# Altium PCB DEBUG_ABZ.PcbDoc
Units mm, origin at the board's own origin, x right, y up, seen from the top; angles counter-clockwise.
Board outline 45.97 x 52.51 mm, 2 copper layers (Top Layer, Bottom Layer), stack 1.57 mm thick; 30 components, 38 nets, 172 pads, 192 vias.
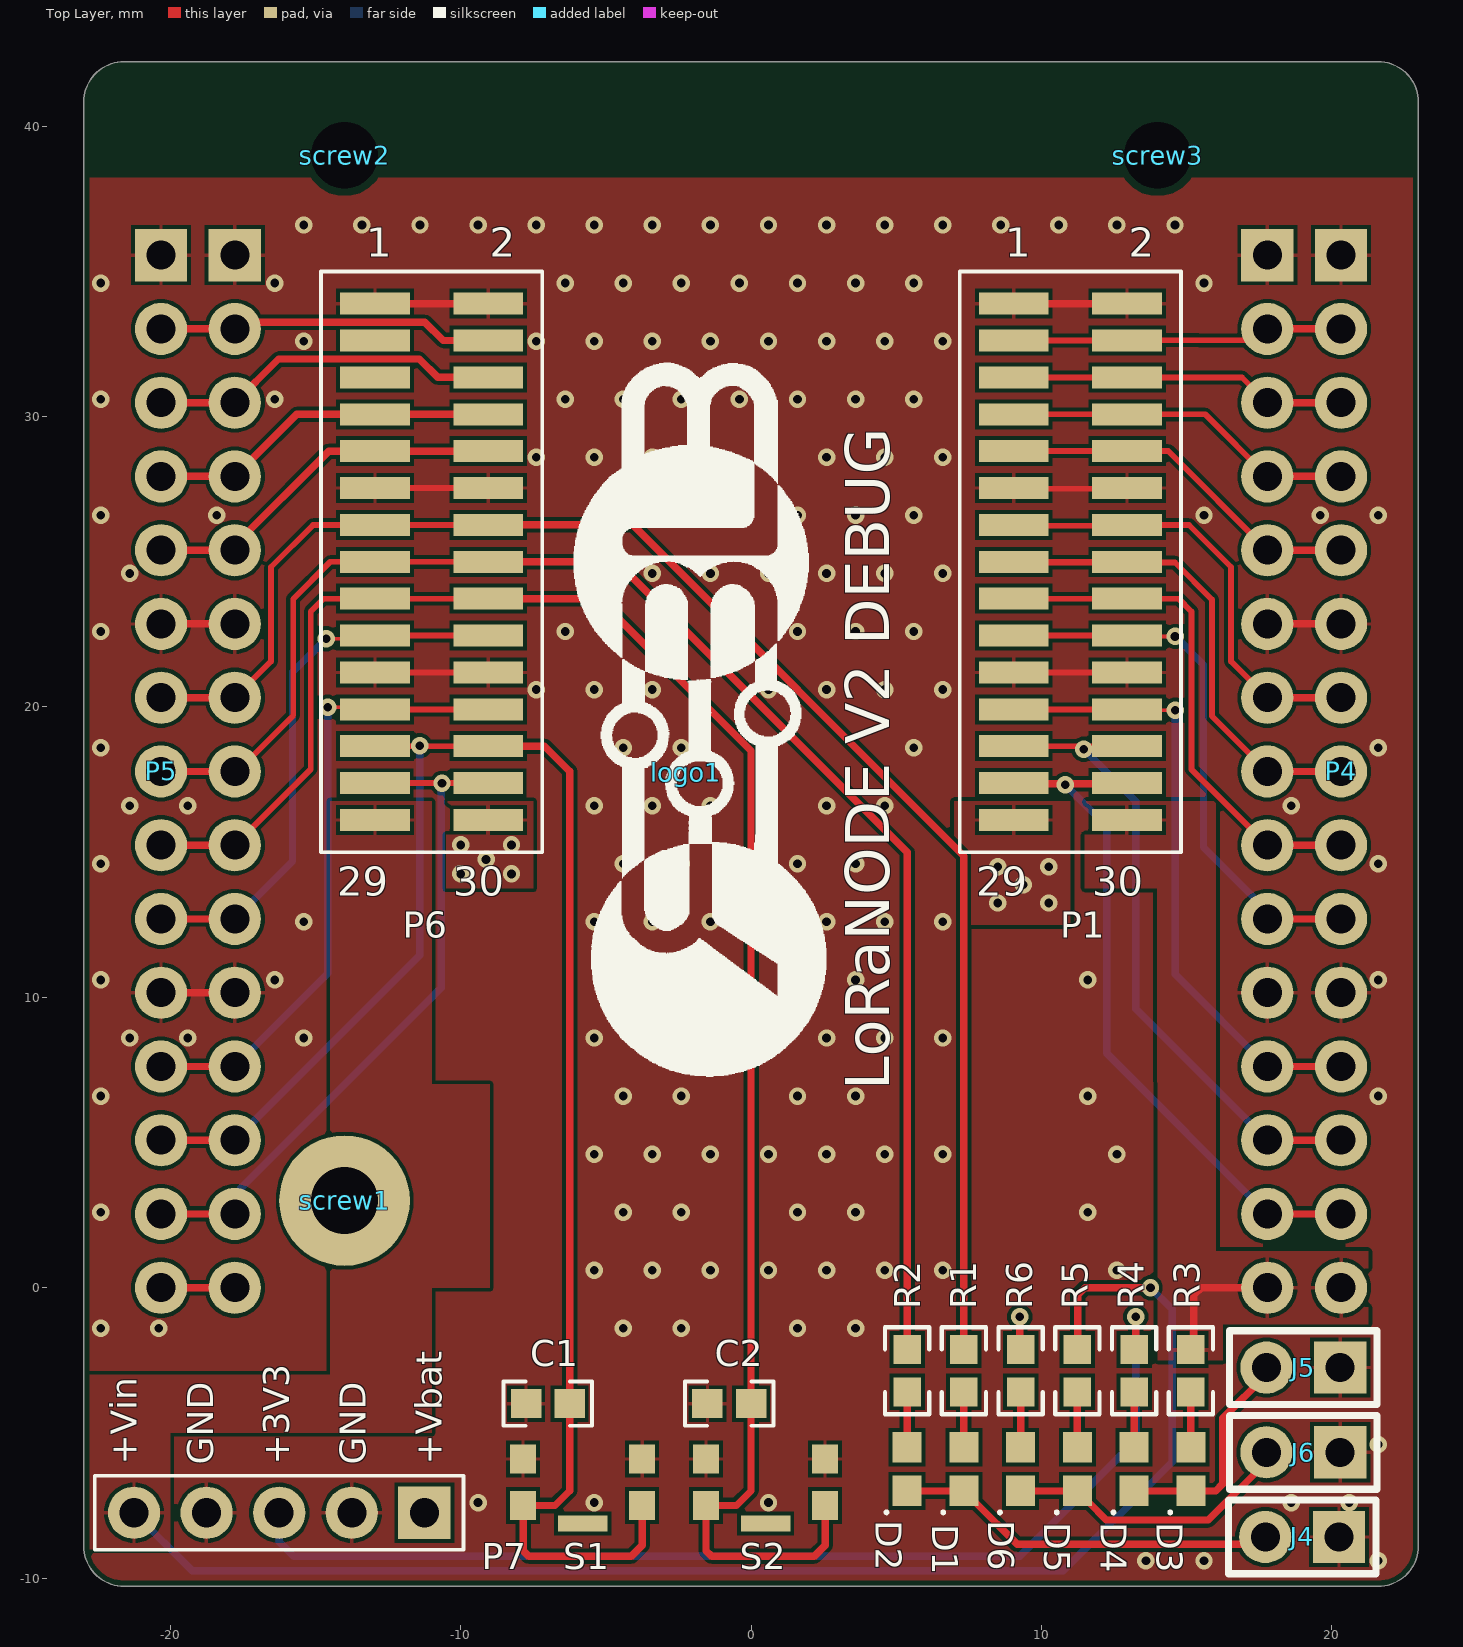
[diagram p0: Top Layer view]
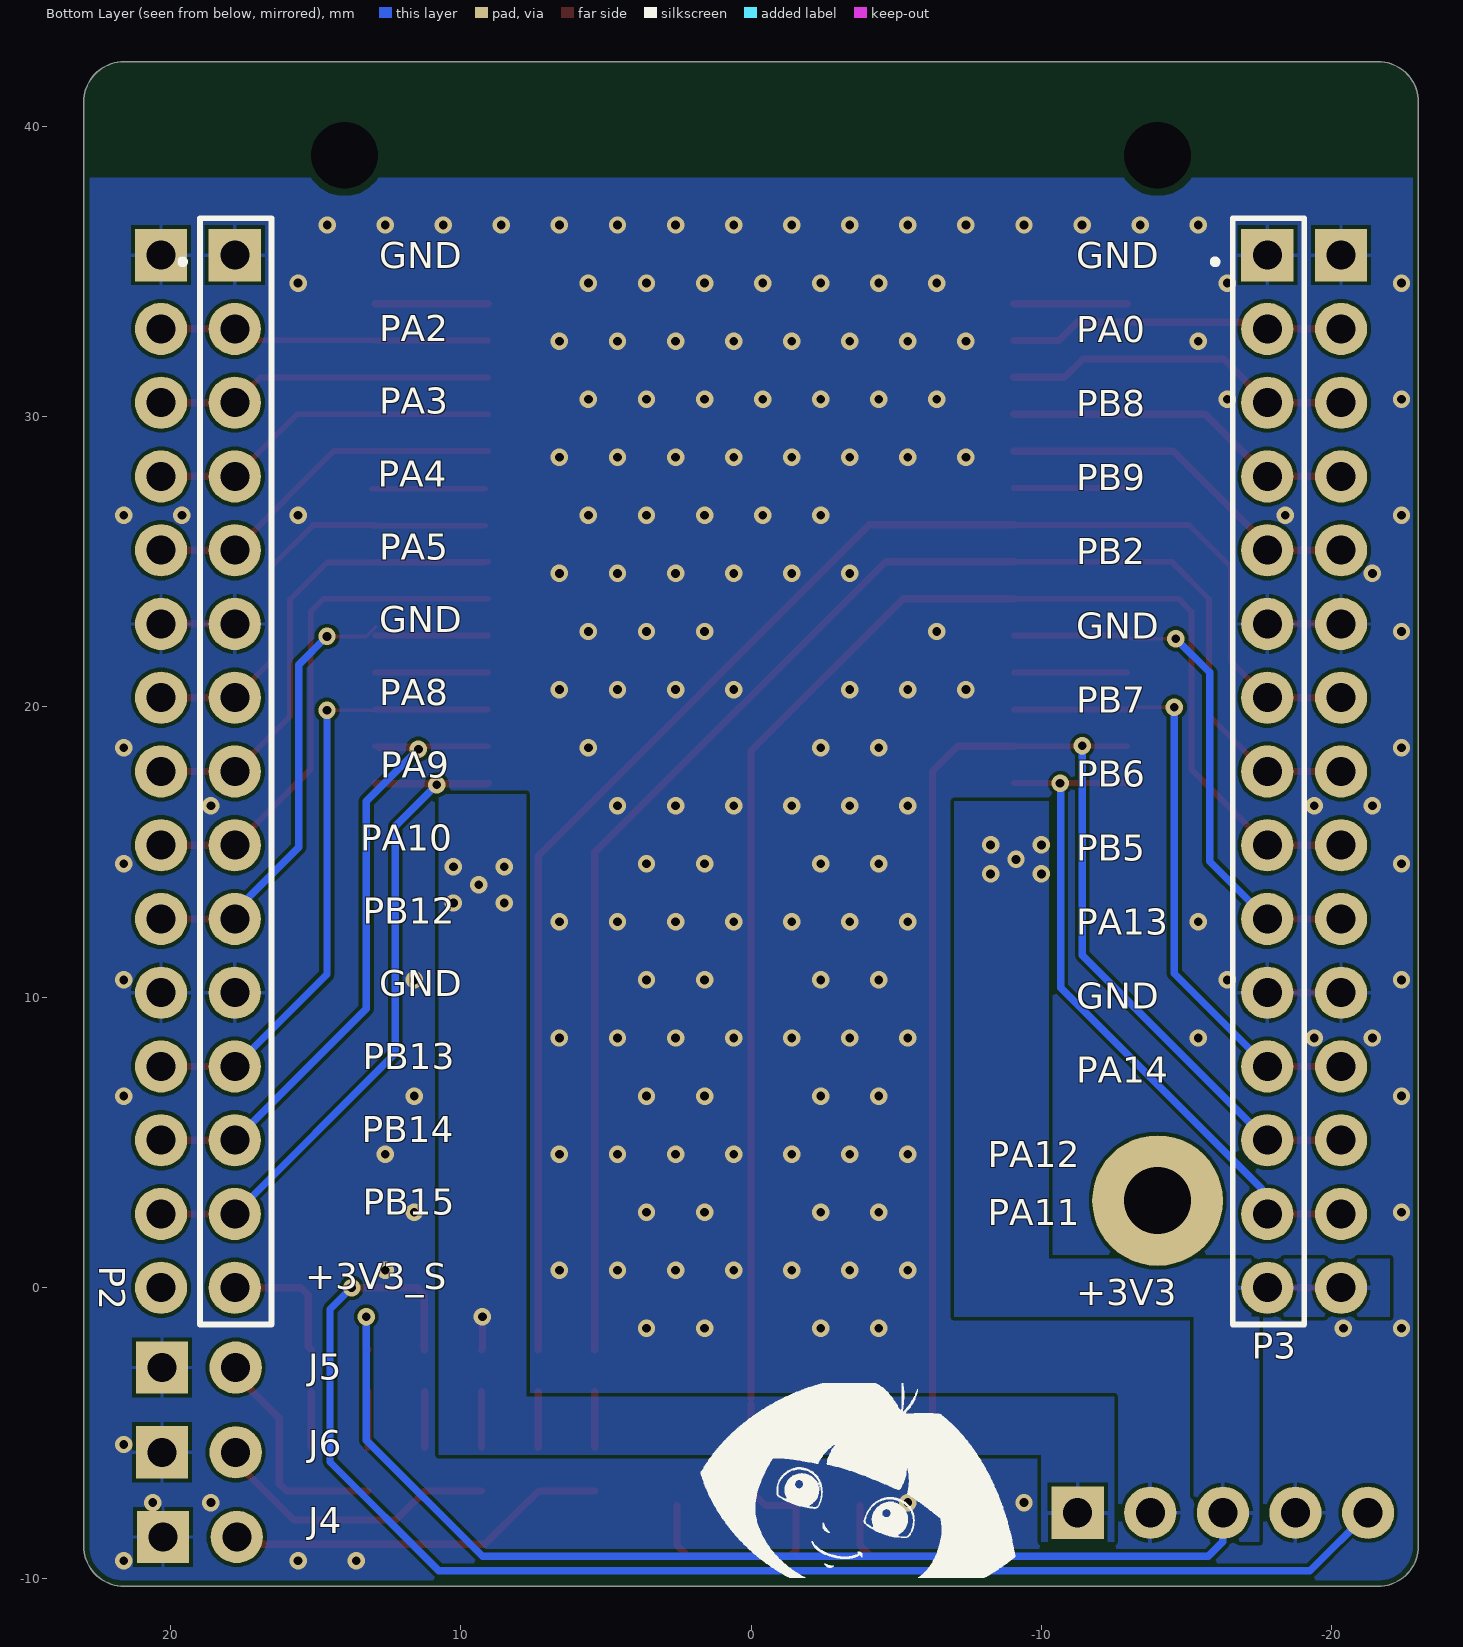
[diagram p1: Bottom Layer view, seen from below]
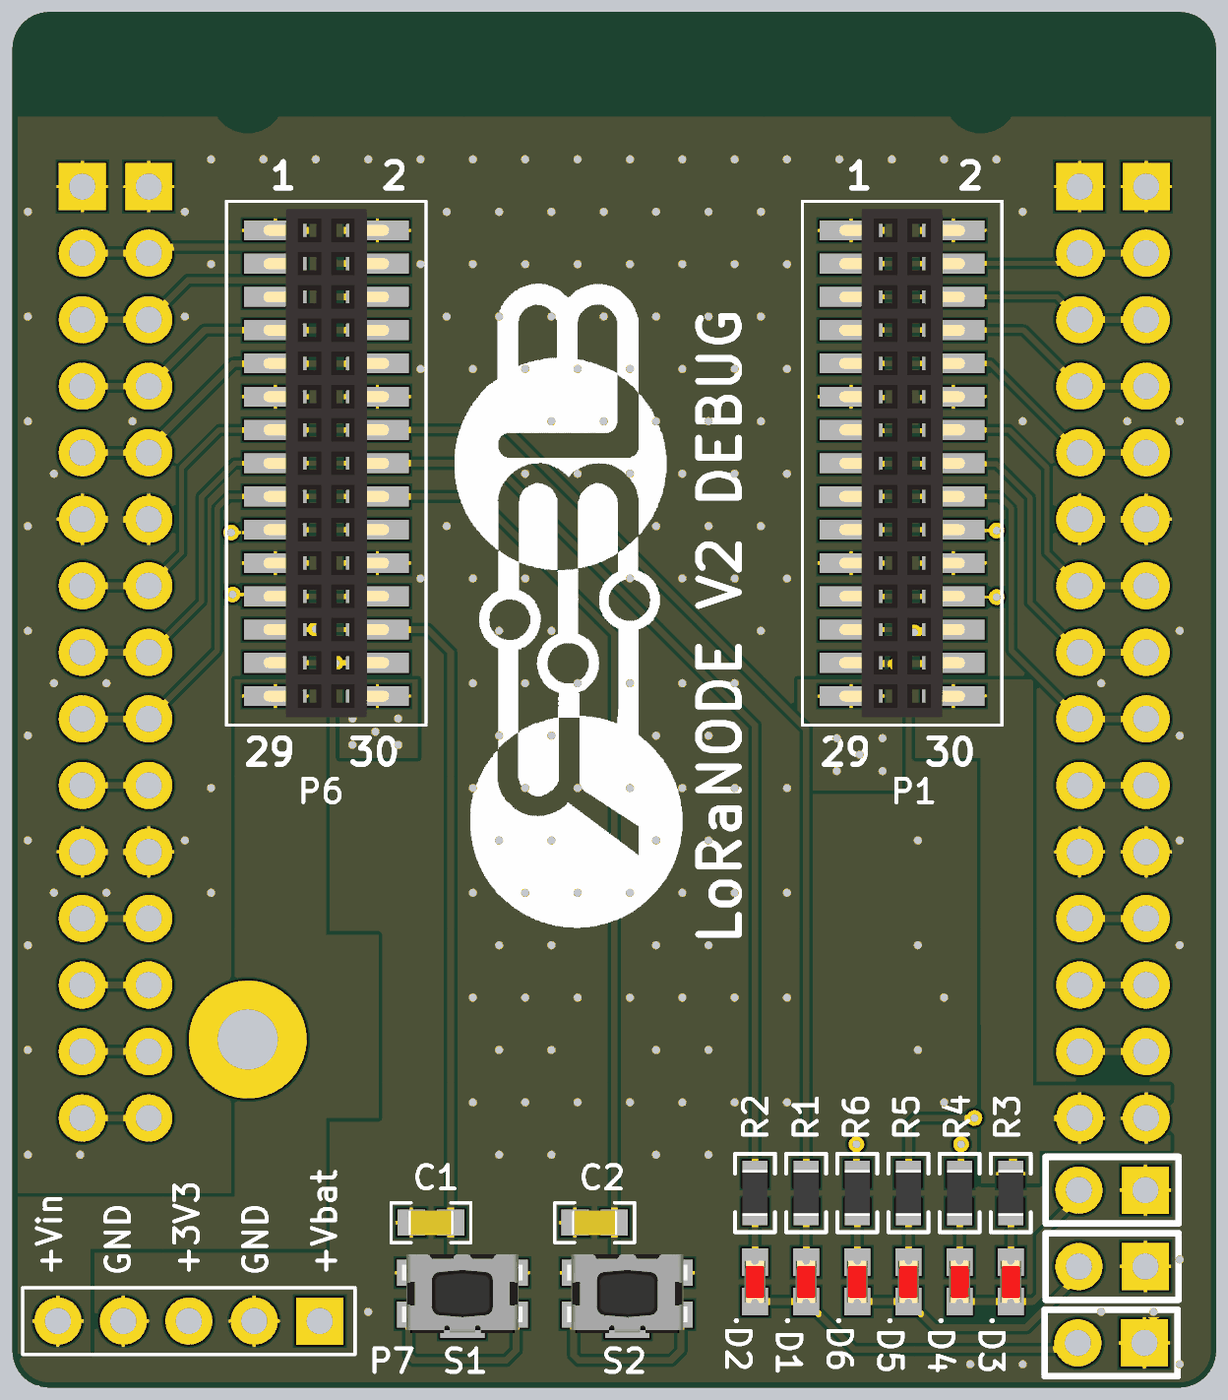
[diagram p2: 3D render of the assembled board from above, using the file's embedded part models]

## Layer stack, top to bottom
Top Solder: solder mask 0.0127, Solder Resist, Dk 3.8
Top Layer: signal copper 0.035
Dielectric: core 1.5, FR-4, Dk 4.5
Bottom Layer: signal copper 0.035
Bottom Solder: solder mask 0.0127, Solder Resist, Dk 3.8

## Board outline
-22.985,-8.89 ccw(c-21.59,-8.89) -21.59,-10.285 21.59,-10.285 ccw(c21.59,-8.89) 22.985,-8.89 22.985,40.83 ccw(c21.59,40.83) 21.59,42.225 -21.589,42.225 ccw(c-21.59,42.1) -21.59,42.225 ccw(c-21.59,40.83) -22.985,40.83

## Design rules (kind name [scope] priority, off if disabled: settings)
BoardOutlineClearance [All] p1: gap=0.2 ignorepadtopadclearanceinfootprint=FALSE
Clearance [All] p1: gap=0.127 ignorepadtopadclearanceinfootprint=FALSE except(0.25: Arc-Hole Track-Hole SMDPad-Hole THPad-Hole Via-Hole Fill-Hole Poly-Hole Region-Hole Text-Hole)
ComponentClearance [All] p1: gap=0.127 collisioncheckmode=3 verticalgap=0.127 showdistances=TRUE
DiffPairsRouting [All] p1: maxlimit=0.254 minlimit=0.127 mostfreqgap=0.127 toplayer_minwidth=0.127 toplayer_maxwidth=25.4 toplayer_prefwidth=0.127 bottomlayer_minwidth=0.127 bottomlayer_maxwidth=25.4 bottomlayer_prefwidth=0.127 maxuncoupledlength=12.7
Height [All] p1: minheight=0 maxheight=1816.048 prefheight=12.7
HoleSize [All] p1: absolutevalues=TRUE maxlimit=6.3 minlimit=0.3 maxpercent=80.000 minpercent=20.000
HoleToHoleClearance [All] p1: gap=0.25 allowstackedmicrovias=FALSE
MinimumAnnularRing [All] p1: minimumring=0.076
MinimumSolderMaskSliver [All] p1: minsoldermaskwidth=0
PlaneClearance [All] p1: clearance=0.127
PlaneConnect PlaneConnectPowerPads [InPadClass('PowerPads')] p1: planeconnectstyle=Direct reliefexpansion=0.508 reliefentries=4 reliefconductorwidth=0.254 reliefairgap=0.254
PlaneConnect [All] p2: pad.planeconnectstyle=Relief pad.reliefexpansion=0.3 pad.reliefentries=4 pad.reliefconductorwidth=0.127 pad.reliefairgap=0.127 via.planeconnectstyle=Direct via.reliefexpansion=0.3 via.reliefentries=4 via.reliefconductorwidth=0.127 via.reliefairgap=0.127
PolygonConnect PolygonConnectPowerPads [All vs (InPadClass('PowerPads'))] p1: connectstyle=Direct reliefconductorwidth=0.254 reliefentries=4 polygonreliefangle="90 Angle" airgapwidth=0.254
PolygonConnect [All] p2: thpad.connectstyle=Relief thpad.reliefconductorwidth=0.127 thpad.reliefentries=4 thpad.polygonreliefangle="90 Angle" thpad.airgapwidth=0.127 smdpad.connectstyle=Relief smdpad.reliefconductorwidth=0.127 smdpad.reliefentries=4 smdpad.polygonreliefangle="90 Angle" smdpad.airgapwidth=0.127 via.connectstyle=Direct via.reliefconductorwidth=0.127 via.reliefentries=4 via.polygonreliefangle="90 Angle" via.airgapwidth=0.127
RoutingVias [All] p1: holewidth=0.3 width=0.6 viastyle="Through Hole" minholewidth=0.3 minwidth=0.6 maxholewidth=0.6 maxwidth=6.6
SilkToSilkClearance [All] p1: silktosilkclearance=0
SilkToSolderMaskClearance [IsPad] p1: minsilkscreentomaskgap=0.127 clearancetoexposedcopper=TRUE
SolderMaskExpansion [All] p1: expansion=0.075 istentingtop=FALSE
Width [All] p1: maxlimit=25.4 minlimit=0.127 preferedwidth=0.127 minimp=50.000000 maximp=50.000000 favimp=50.000000
20 further rules are at their usual default settings.

## Components (designator, comment, footprint, x,y, rotation, side; value= is the part's Value field where it differs from the comment)
C1 "0.1uF 0603" CAP_SMD_0603 -7,-3.995 r180 top
C2 "0.1uF 0603" CAP_SMD_0603 -0.75,-3.995 r180 top
D1 "0603 RED" DIODE_LED_SMD_0603 7.331,-6.25 r270 top
D2 "0603 RED" DIODE_LED_SMD_0603 5.377,-6.25 r270 top
D3 "0603 RED" DIODE_LED_SMD_0603 15.147,-6.25 r270 top
D4 "0603 RED" DIODE_LED_SMD_0603 13.193,-6.25 r270 top
D5 "0603 RED" DIODE_LED_SMD_0603 11.239,-6.25 r270 top
D6 "0603 RED" DIODE_LED_SMD_0603 9.285,-6.25 r270 top
J4 "-" JUMPER_1X2_2.54 20.25,-8.585 r180 top
J5 "-" JUMPER_1X2_2.54 20.29,-2.75 r180 top
J6 "-" JUMPER_1X2_2.54 20.29,-5.667 r180 top
logo1 "LoRaNODE V2 DEBUG" Robolabo10x25 -2.25,17.75 r90 top
P1 "-" CONN-2X15-1.27-FEMALE_RECT-SMD 11,25 r270 top locked
P2 "-" CONN-1X15-2.54-MALE-TH 17.78,35.56 r270 bottom
P3 "-" CONN-1X15-2.54-MALE-TH -17.78,35.56 r270 bottom
P4 "-" CONN-1X15-2.54-MALE-TH-NOPIN 20.32,35.56 r270 top
P5 "-" CONN-1X15-2.54-MALE-TH-NOPIN -20.32,35.56 r270 top
P6 "-" CONN-2X15-1.27-FEMALE_RECT-SMD -11,25 r270 top locked
P7 "-" CONN-1X5-2.54-MALE-TH -16.25,-7.75 r180 top
R1 "470R 0603 1%" RES_SMD_0603 7.331,-2.858 r90 top
R2 "470R 0603 1%" RES_SMD_0603 5.377,-2.858 r90 top
R3 "470R 0603 1%" RES_SMD_0603 15.147,-2.858 r90 top
R4 "470R 0603 1%" RES_SMD_0603 13.193,-2.858 r90 top
R5 "470R 0603 1%" RES_SMD_0603 11.239,-2.858 r90 top
R6 "470R 0603 1%" RES_SMD_0603 9.285,-2.858 r90 top
S1 "SPST 4.6x2.8mm" KMR4_CK_SWITCH -5.8,-6.7 r180 top
S2 "SPST 4.6x2.8mm" KMR4_CK_SWITCH 0.5,-6.7 r180 top
screw1 "M2" M2 26.6,-7.65 r90 top
screw2 "M2" M2_NOPAD#1 36.6,-7.65 r90 top
screw3 "M2" M2_NOPAD#2 47.1,-7.65 r90 top

## Footprints (in the part's own frame and the unit in brackets; to place one, negate y for a bottom-side part, rotate by r counter-clockwise, add the part's x,y. Pads: shape width x height; smd on the part's side, far side on the other; paste and mask are expansions set on the pad)
CAP_SMD_0603 [mm]
  rect 1.05x1 smd: 1(-0.75,0) 2(0.75,0)
  silkscreen extent -1.52,-0.76 1.52,0.76, body extent -0.87,-0.48 0.87,0.48, height 0.55
CONN-1X5-2.54-MALE-TH [mm]
  rect 1.8x1.8 hole 1: 1(-5,0)
  round 1.8 hole 1: 2(-2.5,0) 3(0,0) 4(2.5,0) 5(5,0)
  silkscreen extent -6.35,-1.27 6.35,1.27
CONN-1X15-2.54-MALE-TH [mm]
  rect 1.8x1.8 hole 1: 1(0,0)
  round 1.8 hole 1: 2(2.54,0) 3(5.08,0) 4(7.62,0) 5(10.16,0) 6(12.7,0) 7(15.24,0) 8(17.78,0) 9(20.32,0) 10(22.86,0) 11(25.4,0) 12(27.94,0) 13(30.48,0) 14(33.02,0) 15(35.56,0)
  silkscreen extent -1.27,-1.85 36.83,1.27, body extent -1.27,-1.27 36.83,1.27, height 12.7
CONN-1X15-2.54-MALE-TH-NOPIN [mm]
  rect 1.8x1.8 hole 1: 1(0,0)
  round 1.8 hole 1: 2(2.54,0) 3(5.08,0) 4(7.62,0) 5(10.16,0) 6(12.7,0) 7(15.24,0) 8(17.78,0) 9(20.32,0) 10(22.86,0) 11(25.4,0) 12(27.94,0) 13(30.48,0) 14(33.02,0) 15(35.56,0)
CONN-2X15-1.27-FEMALE_RECT-SMD [mm]
  rect 0.76x2.4 smd: 1(-8.89,-1.95) 2(-8.89,1.95) 3(-7.62,-1.95) 4(-7.62,1.95) 5(-6.35,-1.95) 6(-6.35,1.95) 7(-5.08,-1.95) 8(-5.08,1.95) 9(-3.81,-1.95) 10(-3.81,1.95) 11(-2.54,-1.95) 12(-2.54,1.95) 13(-1.27,-1.95) 14(-1.27,1.95) 15(0,-1.95) 16(0,1.95) 17(1.27,-1.95) 18(1.27,1.95) 19(2.54,-1.95) 20(2.54,1.95) 21(3.81,-1.95) 22(3.81,1.95) 23(5.08,-1.95) 24(5.08,1.95) 25(6.35,-1.95) 26(6.35,1.95) 27(7.62,-1.95) 28(7.62,1.95) 29(8.89,-1.95) 30(8.89,1.95)
  silkscreen extent -10,-3.81 10,3.81, body extent -9.7,-2.4 9.7,2.4, height 4.6
DIODE_LED_SMD_0603 [mm]
  rect 1.05x1 smd: 1(-0.75,0) 2(0.75,0)
  silkscreen extent 1.44,-0.76 1.54,-0.66, body extent -0.81,-0.4 0.81,0.4, height 0.6
JUMPER_1X2_2.54 [mm]
  rect 1.8x1.8 hole 1: 1(0,0)
  round 1.8 hole 1: 2(2.54,0)
  silkscreen extent -1.27,-1.27 3.81,1.27, body extent -1.27,-1.27 3.81,1.27, height 12.7
KMR4_CK_SWITCH [mm]
  rect 0.9x1 smd: 1(-2.05,0.8) 1(2.05,0.8) 2(-2.05,-0.8) 2(2.05,-0.8)
  rect 1.7x0.55 smd: GND(0,1.425)
  body extent -2.3,-1.5 2.3,1.5, height 2.1
M2 [mm] "screw M2.5"
  round 4.5 hole 2.3: H1(10.65,40.6)
M2_NOPAD#1 [mm] "screw M2.5"
  round 0 hole 2.3: H1(46.65,50.6)
M2_NOPAD#2 [mm] "screw M2.5"
  round 0 hole 2.3: H1(46.65,33.1)
RES_SMD_0603 [mm]
  rect 1x0.95 smd: 1(-0.725,0) 2(0.725,0)
  silkscreen extent -1.5,-0.76 1.5,0.76, body extent -0.87,-0.48 0.87,0.48, height 0.55
Robolabo10x25 [mm]
  silkscreen extent -10.48,-4.84 14.11,3.84

## Part data
C1 C2: library part C0603C104K9RACTU, "Cap Ceramic 0.1uF 6.3V X7R 10% Pad SMD 0603 125°C T/R", Capacitance=100nF, Case Code (Imperial)=0603, Case Code (Metric)=1608, Dielectric=X7R, Dielectric Material=Ceramic, Manufacturer 1=KEMET, Max Operating Temperature=125°C, Min Operating Temperature=-55°C, Package Quantity=4000, Supplier Part Number 1=80-C0603C104K9R, Tolerance=10%, Voltage Rating=6.3V, Case/Package=0603, Category="Ceramic Capacitors", ComponentLink1Description=https://datasheet.ciiva.com/13371/kem-c1002-x7r-smd-357932-13371879.pdf?src-supplier=Mouser, ComponentLink1URL=https://datasheet.ciiva.com/13371/kem-c1002-x7r-smd-357932-13371879.pdf?src-supplier=Mouser, Depth=0.8mm, Dissipation Factor=5%, Height=0.8mm, Length=1.6mm, Manufacturer Part Number 1=C0603C104K9RACTU, Mount="Surface Mount", Packaging="Tape and Reel", Pricing 1="1=0,19000, 10=0,13800, 100=0,04500, 1000=0,03700, 4000=0,02700, 8000=0,02400 (USD)", Radiation Hardening=No, RoHS=Yes, Stock 1=22809, Supplier 1=Mouser, Termination=SMD/SMT, Thickness=0.034inch, Voltage Rating (DC)=6.3V, Width=0.8mm
D1 D2 D3 D4 D5 D6: library part KPG1-1608SURC-TT, "Led, Red, 65MCD, 631NM, SMD, 1608", Manufacturer=Kingbright, Supplier Part Number 1=1254508, ComponentLink1Description=http://www.farnell.com/datasheets/2163487.pdf?src-supplier=Farnell, ComponentLink1URL=http://www.farnell.com/datasheets/2163487.pdf?src-supplier=Farnell, Manufacturer Part Number=KPG1-1608SURC-TT, Pricing 1="25=0.16500 (USD)", RoHS=No, Stock 1=2675, Supplier 1=RSComponents
J4 J5 J6: library part JUMPER-1x2-2.54
logo1: library part Robolabo
P1 P6: library part CONN-2X15-1.27-FEMALE-RECT, "CONN-2X15-1.27-MALE-RECT"
P2 P3 P4 P5: library part "CONN-1X15-MALE- RECTO-2.54MM", "CONN PIN HEADER 15 2.54MM", Serigrafia=-
P7: library part CONN-1X5-2.54-MALE-TH
R1 R2 R3 R4 R5 R6: library part CRCW0603470RFKEAHP, "RES SMD 470 OHM 1% 1/10W 0603", Case Code (Imperial)=0603, Case Code (Metric)=1608, Manufacturer=Vishay, Max Operating Temperature=155°C, Max Power Dissipation=250mW, Min Operating Temperature=-55°C, Package Quantity=1, Resistance=470R, Supplier Part Number 1=541-470SCT-ND, Temperature Coefficient=100ppm/°C, Tolerance=1%, Voltage Rating=75V, Case/Package=0603, Category="Chip SMD Resistors", ComponentLink1Description=https://datasheet.ciiva.com/8934/crcwhpe3-8934713.pdf?src-supplier=Avnet, ComponentLink1URL=https://datasheet.ciiva.com/8934/crcwhpe3-8934713.pdf?src-supplier=Avnet, ComponentLink2Description=https://datasheet.ciiva.com/16884/crcwhpe3-16884505.pdf?src-supplier=Avnet+Europe, ComponentLink2URL=https://datasheet.ciiva.com/16884/crcwhpe3-16884505.pdf?src-supplier=Avnet+Europe, ComponentLink3Description=https://datasheet.ciiva.com/7777/424479-7777323.pdf?src-supplier=Element14, ComponentLink3URL=https://datasheet.ciiva.com/7777/424479-7777323.pdf?src-supplier=Element14, ComponentLink4Description=https://datasheet.ciiva.com/7777/424479-7777324.pdf?src-supplier=Element14, ComponentLink4URL=https://datasheet.ciiva.com/7777/424479-7777324.pdf?src-supplier=Element14, Composition="Thick Film", Contact Plating=Tin, Depth=0.85mm, Features="Automotive AEC-Q200", Height=0.022inch, Lead Free="Lead Free", Length=1.6mm, Manufacturer Part Number=CRCW0603470RFKEAHP, Military Standard=Not, Mount="Surface Mount", Number of Terminations=2, Packaging="Tape and Reel", Power Rating=250mW, Pricing 1="1=0.16000, 10=0.13600, 100=0.05330, 1000=0.02232, 2500=0.02046 (USD)", Radiation Hardening=No, REACH SVHC=Unknown, RoHS=Yes, Stock 1=42034, Supplier 1=Digi-Key, Termination=SMD/SMT, Voltage Rating (DC)=75V, Width=0.033inch
S1 S2: library part KMR441NGLFS, Case/Package=SMD/SMT, Current Rating=50mA, Manufacturer="ITT C&K", Max Operating Temperature=85°C, Max Voltage Rating (DC)=32V, Min Operating Temperature=-40°C, Operating Force=4N, Package Quantity=6000, Power Rating=1W, Supplier Part Number 1=611-KMR441NGLFS, Actuator Length=1.1mm, Actuator Type=Standard, Category="Tactile Switches", ComponentLink1Description=https://datasheet.ciiva.com/2900/kmr4-9aug12-2900281.pdf?src-supplier=Digi-Key, ComponentLink1URL=https://datasheet.ciiva.com/2900/kmr4-9aug12-2900281.pdf?src-supplier=Digi-Key, ComponentLink2Description=https://datasheet.ciiva.com/7986/1443639-7986953.pdf?src-supplier=Element14, ComponentLink2URL=https://datasheet.ciiva.com/7986/1443639-7986953.pdf?src-supplier=Element14, ComponentLink3Description=https://datasheet.ciiva.com/2900/kmr4-9aug12-2900282.pdf?src-supplier=Digi-Key, ComponentLink3URL=https://datasheet.ciiva.com/2900/kmr4-9aug12-2900282.pdf?src-supplier=Digi-Key, ComponentLink4Description=https://datasheet.ciiva.com/2900/kmr4-9aug12-2900283.pdf?src-supplier=Digi-Key, ComponentLink4URL=https://datasheet.ciiva.com/2900/kmr4-9aug12-2900283.pdf?src-supplier=Digi-Key, ComponentLink5Description=https://datasheet.ciiva.com/16696/kmr4-9aug12-16696492.pdf?src-supplier=Avnet+Europe, ComponentLink5URL=https://datasheet.ciiva.com/16696/kmr4-9aug12-16696492.pdf?src-supplier=Avnet+Europe, Contact Material=Silver, Contact Plating=Silver, Depth=4.6mm, Illumination Type=Non-Illuminated,Illuminated, Length=2.8mm, Manufacturer Part Number=KMR441NGLFS, Max Current Rating=50mA, Mechanical Life=100000Cycles, Mount="Surface Mount", Orientation=Straight, Packaging="Tape and Reel", Pricing 1="1=0.99000, 10=0.95100, 25=0.93300, 50=0.89700, 100=0.77400, 250=0.70600 (USD)", Radiation Hardening=No, REACH SVHC="No SVHC", RoHS=Yes, Stock 1=6000, Supplier 1=Mouser, Switch Function=Off-Mom, Switch Travel=0.35mm, Termination="Gull Wing", Throw Configuration=SPST, Voltage Rating (DC)=32V
screw1 screw2 screw3: library part screw_M2

## Via types
v1: diameter 0.6, hole 0.3, Top Layer to Bottom Layer, tented both sides, 181 vias
v2: diameter 0.6, hole 0.3, Top Layer to Bottom Layer, 11 vias

## Nets (pads, with @x,y where several pads share a name; then routed paths per layer and width w, separated by ;. In a path a pad name is that pad's centre, name@x,y a point inside that pad or via, vN(x,y) a via of type N, cw(c..) or ccw(c..) an arc to the next point about the centre after c; other vN are vias at no path point)
+3V3: P3.15 P5.15 P6.30 P7.3 R4.2 | length 40.3
  Top Layer w0.254: P5.15 P3.15 ; R4.2 13.25,-2.076 v2(13.25,-1)
  Bottom Layer w0.254: P7.3 -16.25,-8.75 -15.75,-9.25 9.25,-9.25 13.25,-5.25 v2(13.25,-1)
  other v1: -10,14.25 -8.25,14.25 -9.125,14.75 -10,15.25 -8.25,15.25
+3V3_SEN: P1.30 P2.15 P4.15 R3.2 | length 4.6
  Top Layer w0.254: R3.2 15.25,-2.03 15.25,-0.25 15.5,0 P2.15
+Vbat: P1.29 P7.1 R6.2 | length 1.1
  Top Layer w0.254: v2(9.25,-1) 9.25,-2.099 R6.2
  other v1: 8.5,13.25 10.25,13.25 9.375,13.875 8.5,14.5 10.25,14.5
+Vin: P6.29 P7.5 R5.2 | length 48.9
  Top Layer w0.254: R5.2 11.25,-2.122 11.25,-0.25 11.5,0 v2(13.758,0)
  Bottom Layer w0.254: P7.5 -19.25,-9.75 10.75,-9.75 14.5,-6 14.5,-0.742 v2(13.758,0)
+VREF: P6.3
GND: C1.2 C2.2 J4.1 J5.1 J6.1 P1.1 P1.2 P1.11 P1.12 P1.21 P1.22 P2.1 P2.6 P2.11 P3.1 P3.6 P3.11 P4.1 P4.6 P4.11 P5.1 P5.6 P5.11 P6.1 P6.2 P6.11 P6.12 P6.21 P6.22 P7.2 P7.4 S1.2 S2.2 | length 31
  Top Layer w0.2: P6.21 P6.22 ; P6.11@-12.95,27.538 P6.12@-9.05,27.538 ; P1.21@9.05,21.188 P1.22@12.95,21.188 ; P1.11@9.157,27.513 P1.12@13.057,27.513
  Top Layer w0.254: P5.11 P3.11 ; P5.6 P3.6 ; P6.1 P6.2 ; P1.1 P1.2 ; P2.6 P4.6
  other v1: 13.6,-9.4 15.6,-9.4 21.6,-9.4 -9.4,-7.4 -5.4,-7.4 0.6,-7.4 18.6,-7.4 20.6,-7.4 21.6,-5.4 -22.4,-1.4 -20.4,-1.4 -4.4,-1.4 -2.4,-1.4 1.6,-1.4 3.6,-1.4 -5.4,0.6 -3.4,0.6 -1.4,0.6 0.6,0.6 2.6,0.6 4.6,0.6 6.6,0.6 12.6,0.6 -22.4,2.6 -4.4,2.6 -2.4,2.6 1.6,2.6 3.6,2.6 11.6,2.6 -5.4,4.6 -3.4,4.6 -1.4,4.6 0.6,4.6 2.6,4.6 4.6,4.6 6.6,4.6 12.6,4.6 -22.4,6.6 -4.4,6.6 -2.4,6.6 1.6,6.6 3.6,6.6 11.6,6.6 21.6,6.6 -21.4,8.6 -19.4,8.6 -15.4,8.6 -5.4,8.6 -3.4,8.6 -1.4,8.6 0.6,8.6 2.6,8.6 4.6,8.6 6.6,8.6 -22.4,10.6 -16.4,10.6 -4.4,10.6 -2.4,10.6 1.6,10.6 3.6,10.6 11.6,10.6 21.6,10.6 -15.4,12.6 -5.4,12.6 -3.4,12.6 -1.4,12.6 0.6,12.6 2.6,12.6 4.6,12.6 6.6,12.6 -22.4,14.6 -4.4,14.6 -2.4,14.6 1.6,14.6 3.6,14.6 21.6,14.6 -21.4,16.6 -19.4,16.6 -5.4,16.6 -3.4,16.6 -1.4,16.6 0.6,16.6 2.6,16.6 4.6,16.6 18.6,16.6 -22.4,18.6 -4.4,18.6 -2.4,18.6 5.6,18.6 21.6,18.6 -7.4,20.6 -5.4,20.6 -3.4,20.6 0.6,20.6 2.6,20.6 4.6,20.6 6.6,20.6 -22.4,22.6 -6.4,22.6 1.6,22.6 3.6,22.6 5.6,22.6 -21.4,24.6 -3.4,24.6 -1.4,24.6 0.6,24.6 2.6,24.6 4.6,24.6 6.6,24.6 -22.4,26.6 -18.4,26.6 -2.4,26.6 -0.4,26.6 1.6,26.6 3.6,26.6 5.6,26.6 15.6,26.6 19.6,26.6 21.6,26.6 -7.4,28.6 -5.4,28.6 -3.4,28.6 -1.4,28.6 0.6,28.6 2.6,28.6 4.6,28.6 6.6,28.6 -22.4,30.6 -16.4,30.6 -6.4,30.6 -4.4,30.6 -2.4,30.6 -0.4,30.6 1.6,30.6 3.6,30.6 5.6,30.6 -15.4,32.6 -7.4,32.6 -5.4,32.6 -3.4,32.6 -1.4,32.6 0.6,32.6 2.6,32.6 4.6,32.6 6.6,32.6 -22.4,34.6 -16.4,34.6 -6.4,34.6 -4.4,34.6 -2.4,34.6 -0.4,34.6 1.6,34.6 3.6,34.6 5.6,34.6 15.6,34.6 -15.4,36.6 -13.4,36.6 -11.4,36.6 -9.4,36.6 -7.4,36.6 -5.4,36.6 -3.4,36.6 -1.4,36.6 0.6,36.6 2.6,36.6 4.6,36.6 6.6,36.6 8.6,36.6 10.6,36.6 12.6,36.6 14.6,36.6
NetD1_1: D1.1 R1.1 | length 1.9
  Top Layer w0.254: D1.1 R1.1
NetD1_2: D1.2 D2.2 J4.2 | length 13.1
  Top Layer w0.254: D2.2 7.306,-7 7.704,-7.398 7.729,-7.398 9.165,-8.835 J4.2@17.71,-8.835
NetD2_1: D2.1 R2.1 | length 1.9
  Top Layer w0.254: D2.1 R2.1
NetD3_1: D3.1 R3.1 | length 1.9
  Top Layer w0.254: D3.1 R3.1
NetD3_2: D3.2 D4.2 J5.2 | length 7.5
  Top Layer w0.254: D4.2 D3.2 16,-7 16.25,-6.75 16.25,-4.5 J5.2@17.75,-3
NetD4_1: D4.1 R4.1 | length 1.9
  Top Layer w0.254: D4.1 R4.1
NetD5_1: D5.1 R5.1 | length 1.9
  Top Layer w0.254: D5.1 R5.1
NetD5_2: D5.2 D6.2 J6.2 | length 9.8
  Top Layer w0.254: D6.2 D5.2 11.239,-7.025 11.612,-7.398 11.637,-7.398 12.239,-8 15.75,-8 17.75,-6 J6.2@17.75,-5.917
NetD6_1: D6.1 R6.1 | length 1.9
  Top Layer w0.254: D6.1 R6.1
PA0: P3.2 P5.2 P6.4 | length 11.6
  Top Layer w0.254: P5.2 P3.2 -17.546,33.254 -11.232,33.254 -10.598,32.62 P6.4
PA2: P1.3 P1.4 P2.2 P4.2 | length 11.5
  Top Layer w0.127: P1.4@12.929,32.631 P1.4@12.94,32.62
  Top Layer w0.2: P1.3 12.94,32.62 P1.4 ; P1.4@12.929,32.631 15.423,32.631 15.427,32.627 17.063,32.627 17.456,33.02 P2.2
  Top Layer w0.254: P2.2 P4.2
PA3: P1.5 P1.6 P2.3 P4.3 | length 11.6
  Top Layer w0.2: P1.5 P1.6 16.91,31.35 P2.3
  Top Layer w0.254: P2.3 P4.3
PA4: P1.7 P1.8 P2.4 P4.4 | length 12.2
  Top Layer w0.2: P1.7 P1.8 15.64,30.08 P2.4
  Top Layer w0.254: P2.4 P4.4
PA5: P1.9 P1.10 P2.5 P4.5 | length 12.7
  Top Layer w0.127: P1.10 P1.10
  Top Layer w0.2: P1.9 P1.10 14.368,28.812 P2.5
  Top Layer w0.254: P2.5 P4.5
PA8: P1.13 P1.14 P2.7 P4.7 | length 15.6
  Top Layer w0.2: P1.13@9.157,26.243 P1.14@13.057,26.243 ; P1.14 15.081,26.27 16.529,24.822 16.529,21.571 P2.7
  Top Layer w0.254: P2.7 P4.7
PA9: P1.15 P1.16 P2.8 P4.8 | length 20.4
  Top Layer w0.2: P1.15@9.05,24.998 P1.16@12.95,24.998 ; P1.15@9.157,24.975 13.057,24.975 14.597,24.975 15.875,23.697 15.875,19.685 P2.8
  Top Layer w0.254: P2.8 P4.8
PA10: P1.17 P1.18 P2.9 P4.9 | length 18
  Top Layer w0.2: P1.17@9.05,23.728 P1.18@12.95,23.728 ; P1.18 14.726,23.73 15.164,23.292 15.164,17.856 P2.9
  Top Layer w0.254: P2.9 P4.9
PA11: P3.14 P5.14 P6.27 P6.28 | length 26.5
  Top Layer w0.127: P6.27 -12.944,17.374 v2(-10.643,17.374)
  Top Layer w0.2: P6.27 P6.28
  Top Layer w0.254: P5.14 P3.14
  Bottom Layer w0.254: P3.14 -17.574,2.746 -17.574,3.426 -10.668,10.332 -10.668,17.348 v2(-10.643,17.374)
PA12: C1.1 P3.13 P5.13 P6.25 P6.26 S1.1 | length 61.2
  Top Layer w0.127: P6.25 -12.931,18.669 v2(-11.405,18.669)
  Top Layer w0.2: P6.25@-12.95,18.648 P6.26@-9.05,18.648
  Top Layer w0.254: P5.13 P3.13 ; P6.26 -7.111,18.65 -6.25,17.789 C1.1 -6.25,-7 -6.75,-7.5 -7.85,-7.5 -7.85,-9.056 -7.656,-9.25 -4.129,-9.25 -3.75,-8.871 S1.1@-3.75,-7.5
  Bottom Layer w0.254: P3.13 -11.405,11.455 v2(-11.405,18.669)
PA13: P3.10 P5.10 P6.19 P6.20 | length 19.1
  Top Layer w0.127: v2(-14.63,22.352) -13.058,22.352 P6.19
  Top Layer w0.2: P6.19@-12.95,22.458 P6.20@-9.05,22.458
  Top Layer w0.254: P5.10 P3.10
  Bottom Layer w0.254: P3.10 -15.791,14.689 -15.791,21.192 v2(-14.63,22.352)
PA14: P3.12 P5.12 P6.23 P6.24 | length 21.8
  Top Layer w0.127: v2(-14.577,19.987) -13.017,19.987 P6.23
  Top Layer w0.2: P6.23@-12.95,19.918 P6.24@-9.05,19.918
  Top Layer w0.254: P5.12 P3.12
  Bottom Layer w0.254: P3.12 -14.577,10.823 v2(-14.577,19.987)
PB2: P3.5 P5.5 P6.9 P6.10 | length 12.8
  Top Layer w0.254: P5.5 P3.5 -17.78,25.578 -14.548,28.81 P6.9 P6.10
PB5: C2.1 P3.9 P5.9 P6.17 P6.18 S2.1 | length 63.5
  Top Layer w0.2: P3.9 -15.164,17.856 -15.164,23.292 -14.726,23.73 P6.17 ; P6.17@-12.95,23.728 P6.18@-9.05,23.728
  Top Layer w0.254: P5.9 P3.9 ; P6.18 -5.239,23.73 0,18.491 C2.1@0,-3.795 ; C2.1 0,-7 -0.5,-7.5 -1.55,-7.5 -1.55,-9.056 -1.356,-9.25 2.171,-9.25 2.55,-8.871 S2.1@2.55,-7.5
PB6: P3.8 P5.8 P6.15 P6.16 R2.2 | length 52.2
  Top Layer w0.2: P3.8@-17.673,17.805 -15.768,19.71 -15.768,23.722 -14.489,25 P6.15 P6.16
  Top Layer w0.254: P5.8 P3.8 ; P6.16 -4.629,25 5.377,14.994 R2.2
PB7: P3.7 P5.7 P6.13 P6.14 R1.2 | length 53.7
  Top Layer w0.2: P3.7 -16.529,21.571 -16.529,24.822 -15.081,26.27 P6.13 ; P6.13@-12.95,26.268 P6.14@-9.05,26.268
  Top Layer w0.254: P5.7 P3.7 ; P6.14 -4.07,26.27 7.331,14.869 R1.2
PB8: P3.3 P5.3 P6.6 | length 12.2
  Top Layer w0.254: P5.3 P3.3 -16.276,31.984 -11.43,31.984 -10.796,31.35 P6.6
PB9: P3.4 P5.4 P6.7 P6.8 | length 12.2
  Top Layer w0.254: P5.4 P3.4 -15.64,30.08 P6.7 P6.8
PB12: P1.19 P1.20 P2.10 P4.10 | length 19
  Top Layer w0.127: P1.20@12.92,22.76 13.25,22.43 v2(14.603,22.43)
  Top Layer w0.2: P1.19 P1.20
  Top Layer w0.254: P2.10 P4.10
  Bottom Layer w0.254: v2(14.603,22.43) 15.581,21.453 15.581,15.169 P2.10@17.75,13
PB13: P1.23 P1.24 P2.12 P4.12 | length 21.7
  Top Layer w0.127: P1.24 12.982,19.888 v2(14.605,19.888)
  Top Layer w0.2: P1.23@9.05,19.918 P1.24@12.95,19.918
  Top Layer w0.254: P2.12 P4.12
  Bottom Layer w0.254: v2(14.605,19.888) 14.605,10.795 P2.12
PB14: P1.25 P1.26 P2.13 P4.13 | length 24.1
  Top Layer w0.127: v2(11.455,18.542) 12.842,18.542 P1.26
  Top Layer w0.2: P1.25 P1.26
  Top Layer w0.254: P2.13 P4.13
  Bottom Layer w0.254: v2(11.455,18.542) 13.25,16.747 13.25,9.61 P2.13
PB15: P1.27 P1.28 P2.14 P4.14 | length 24.2
  Top Layer w0.254: P1.27 9.079,17.351 10.792,17.351 v2(10.82,17.323) 10.849,17.351 12.921,17.351 P1.28 ; P2.14 P4.14
  Bottom Layer w0.254: v2(10.82,17.323) 12.25,15.893 12.25,8.07 P2.14
RST: P6.5
pads on no net: S1.GND S2.GND screw1.H1 screw2.H1 screw3.H1

## Polygon pours and split planes (outlines as drawn)
GND on Bottom Layer "VIN_L-01_P-001" (solid, pour order 15): -22.985,-8.89 -22.985,38.225 22.985,38.225 22.985,-8.89 cw(c21.59,-8.89) 21.59,-10.285 -21.59,-10.285 cw(c-21.59,-8.89)
+Vbat on Bottom Layer "VIN_L-01_P-001" (solid, pour order 6): -12.5,-8.75 -10,-8.75 -10,-5.75 -12.5,-5.75
+Vbat on Bottom Layer "VIN_L-01_P-001" (solid, pour order 0): -12.5,-3.75 7.75,-3.75 7.75,17 10.75,17 10.75,-5.75 -12.5,-5.75
+3V3 on Bottom Layer "VIN_L-01_P-001" (solid, pour order 5): -17.5,-8.75 -15.25,-8.75 -15.25,-1 -17.5,-1
+3V3 on Bottom Layer "VIN_L-01_P-001" (solid, pour order 3): -22,-1 -22,1 -10.25,1 -10.25,16.75 -7,16.75 -7,-1
GND on Top Layer "VIN_L-01_P-001" (solid, pour order 10): -22.985,-8.89 -22.985,38.225 22.985,38.225 22.985,-8.89 cw(c21.59,-8.89) 21.59,-10.285 -21.59,-10.285 cw(c-21.59,-8.89)
+Vin on Top Layer "VIN_L-01_P-001" (solid, pour order 9): -11,7 -9,7 -9,0 -11,0
+3V3_SEN on Top Layer "VIN_L-01_P-001" (solid, pour order 8): 11.5,16.75 16,16.75 16,1.25 21.25,1.25 21.25,-1.25 16.25,-1.25 16.25,-2.5 14.003,-2.5 13.997,13.75 11.5,13.75
+3V3 on Top Layer "VIN_L-01_P-001" (solid, pour order 4): -10.5,16.75 -7.5,16.75 -7.5,13.75 -10.5,13.75
+Vin on Top Layer "VIN_L-01_P-001" (solid, pour order 2): -11,16.75 -11,-5 -20,-5 -20,-9 -23,-9 -23,-3 -14.5,-3 -14.5,16.75
+Vbat on Top Layer "VIN_L-01_P-001" (solid, pour order 1): 7,16.75 11,16.75 11,12.5 7,12.5

## Silkscreen, mask and mechanical layers (free items; w line width, h text height)
Top Overlay:
  text "+Vin" at -21.15,-6.1 h0.9 r90
  text "GND" at -18.525,-6.1 h0.9 r90
  text "+3V3" at -15.9,-6.1 h0.9 r90
  text "GND" at -13.275,-6.1 h0.9 r90
  text "+Vbat" at -10.65,-6.1 h0.9 r90
Bottom Overlay:
  drawing of 6 lines, arcs and shapes, not listed
  text "GND" at -11.204,35.11 h0.9
  text "GND" at 12.805,35.11 h0.9
  text "PA2" at 12.805,32.602 h0.9
  text "PA0" at -11.204,32.559 h0.9
  text "PA3" at 12.805,30.094 h0.9
  text "PB8" at -11.204,30.009 h0.9
  text "PA4" at 12.848,27.586 h0.9
  text "PB9" at -11.204,27.458 h0.9
  text "PA5" at 12.805,25.079 h0.9
  text "PB2" at -11.204,24.907 h0.9
  text "GND" at 12.805,22.571 h0.9
  text "GND" at -11.204,22.356 h0.9
  text "PA8" at 12.805,20.063 h0.9
  text "PB7" at -11.204,19.806 h0.9
  text "PA9" at 12.762,17.555 h0.9
  text "PB6" at -11.204,17.255 h0.9
  text "PA10" at 13.465,15.047 h0.9
  text "PB5" at -11.204,14.704 h0.9
  text "PB12" at 13.37,12.539 h0.9
  text "PA13" at -11.204,12.154 h0.9
  text "GND" at 12.805,10.031 h0.9
  text "GND" at -11.204,9.603 h0.9
  text "PB13" at 13.37,7.524 h0.9
  text "PA14" at -11.204,7.052 h0.9
  text "PB14" at 13.413,5.016 h0.9
  text "PA12" at -8.15,4.15 h0.9
  text "PB15" at 13.37,2.508 h0.9
  text "PA11" at -8.15,2.15 h0.9
  text "+3V3_S" at 15.35,-0.05 h0.9
  text "+3V3" at -11.204,-0.6 h0.9
Mechanical 1:
  lines w0.25: 22.86,36.504 22.86,40.83 ccw(c21.59,40.83) 21.59,42.1 -21.59,42.1 ccw(c-21.59,40.83) -22.86,40.83 -22.86,36.83 -22.86,-8.89 ccw(c-21.59,-8.89) -21.59,-10.16 21.59,-10.16 ccw(c21.59,-8.89) 22.86,-8.89 22.86,36.83
Mechanical 15:
  lines w0.25: -16.865,13 17.135,13 ; -14,3 -14,0 0,0 ; 20.32,38.1 21.59,38.1 ; -17,48.73 cw(c-15.73,48.73) -15.73,50 16,50 cw(c16,49) 17,49 ; -17,48.73 -17,1 ccw(c-16,1) -16,0 0,0 ; -17,48.73 -17,37 17,37 17,49 ; 0,0 16,0 ccw(c16,1) 17,1 17,49
Drill Drawing:
  drawing of 221 lines, arcs and shapes, not listed
  text "Layer" at 39.969,35.288 h1.52
  text "Name" at 50.38,35.288 h1.52
  text "Material" at 73.996,35.288 h1.52
  text "Thickness" at 95.834,35.288 h1.52
  text "Constant" at 112.34,35.288 h1.52
  text "Board Layer Stack" at 126.814,35.288 h1.52
  text "Top Overlay" at 50.38,32.24 h1.52
  text "Top Solder" at 50.38,29.192 h1.52
  text "Solder Resist" at 73.996,29.192 h1.52
  text "0.50mil" at 95.834,29.192 h1.52
  text "3.8" at 112.34,29.192 h1.52
  text "1" at 39.969,26.144 h1.52
  text "Top Layer" at 50.38,26.144 h1.52
  text "1.38mil" at 95.834,26.144 h1.52
  text "Dielectric" at 50.38,23.096 h1.52
  text "FR-4" at 73.996,23.096 h1.52
  text "59.06mil" at 95.834,23.096 h1.52
  text "4.5" at 112.34,23.096 h1.52
  text "2" at 39.969,20.048 h1.52
  text "Bottom Layer" at 50.38,20.048 h1.52
  text "1.38mil" at 95.834,20.048 h1.52
  text "Bottom Solder" at 50.38,17 h1.52
  text "Solder Resist" at 73.996,17 h1.52
  text "0.50mil" at 95.834,17 h1.52
  text "3.8" at 112.34,17 h1.52
  text "Bottom Overlay" at 50.38,13.952 h1.52
  text "Symbol" at 41.477,6.573 h1.83
  text "Count" at 54.326,6.573 h1.83
  text "Hole Size" at 69.562,6.573 h1.83
  text "Plated" at 97.494,6.573 h1.83
  text "Hole Type" at 110.343,6.573 h1.83
  text "Drill Layer Pair" at 128.981,6.573 h1.83
  text "Via/Pad" at 167.07,6.573 h1.83
  text "Pad Shape" at 182.052,6.573 h1.83
  text "Template" at 200.995,6.573 h1.83
  text "192" at 54.326,2.763 h1.52
  text "11.81mil (0.300mm)" at 69.562,2.763 h1.52
  text "PTH" at 97.494,2.763 h1.52
  text "Round" at 110.343,2.763 h1.52
  text "Top Layer - Bottom Layer" at 128.981,2.763 h1.52
  text "Via" at 167.07,2.763 h1.52
  text "Rounded" at 182.052,2.763 h1.52
  text "(Mixed)" at 200.995,2.763 h1.52
  text "71" at 54.326,-1.047 h1.52
  text "39.37mil (1.000mm)" at 69.562,-1.047 h1.52
  text "PTH" at 97.494,-1.047 h1.52
  text "Round" at 110.343,-1.047 h1.52
  text "Top Layer - Bottom Layer" at 128.981,-1.047 h1.52
  text "Pad" at 167.07,-1.047 h1.52
  text "(Mixed)" at 182.052,-1.047 h1.52
  text "(Mixed)" at 200.995,-1.047 h1.52
  text "3" at 54.326,-4.857 h1.52
  text "90.55mil (2.300mm)" at 69.562,-4.857 h1.52
  text "PTH" at 97.494,-4.857 h1.52
  text "Round" at 110.343,-4.857 h1.52
  text "Top Layer - Bottom Layer" at 128.981,-4.857 h1.52
  text "Pad" at 167.07,-4.857 h1.52
  text "Rounded" at 182.052,-4.857 h1.52
  text "(Mixed)" at 200.995,-4.857 h1.52
  text "266 Total" at 54.326,-8.667 h1.52

## Dimensions
21.59,-10.16 to 22.86,38.1 on Drill Drawing
-22.86,-8.89 to 22.86,-8.89 on Drill Drawing

## Text inside footprints (layer, text, board x,y; h text height)
P1: Top Overlay "30" at 11.75,13.5 h1; Top Overlay "29" at 7.75,13.5 h1; Top Overlay "2" at 13,35.5 h1; Top Overlay "1" at 8.75,35.5 h1
P6: Top Overlay "30" at -10.25,13.5 h1; Top Overlay "29" at -14.25,13.5 h1; Top Overlay "2" at -9,35.5 h1; Top Overlay "1" at -13.25,35.5 h1